# Altium PCB coilcube_frontend_v2.PcbDoc
Units mil, origin at the board's own origin, x right, y up, seen from the top; angles counter-clockwise.
Board outline 1500 x 875 mil, 2 copper layers (Top Layer, Bottom Layer); 42 components, 27 nets, 107 pads, 7 vias.
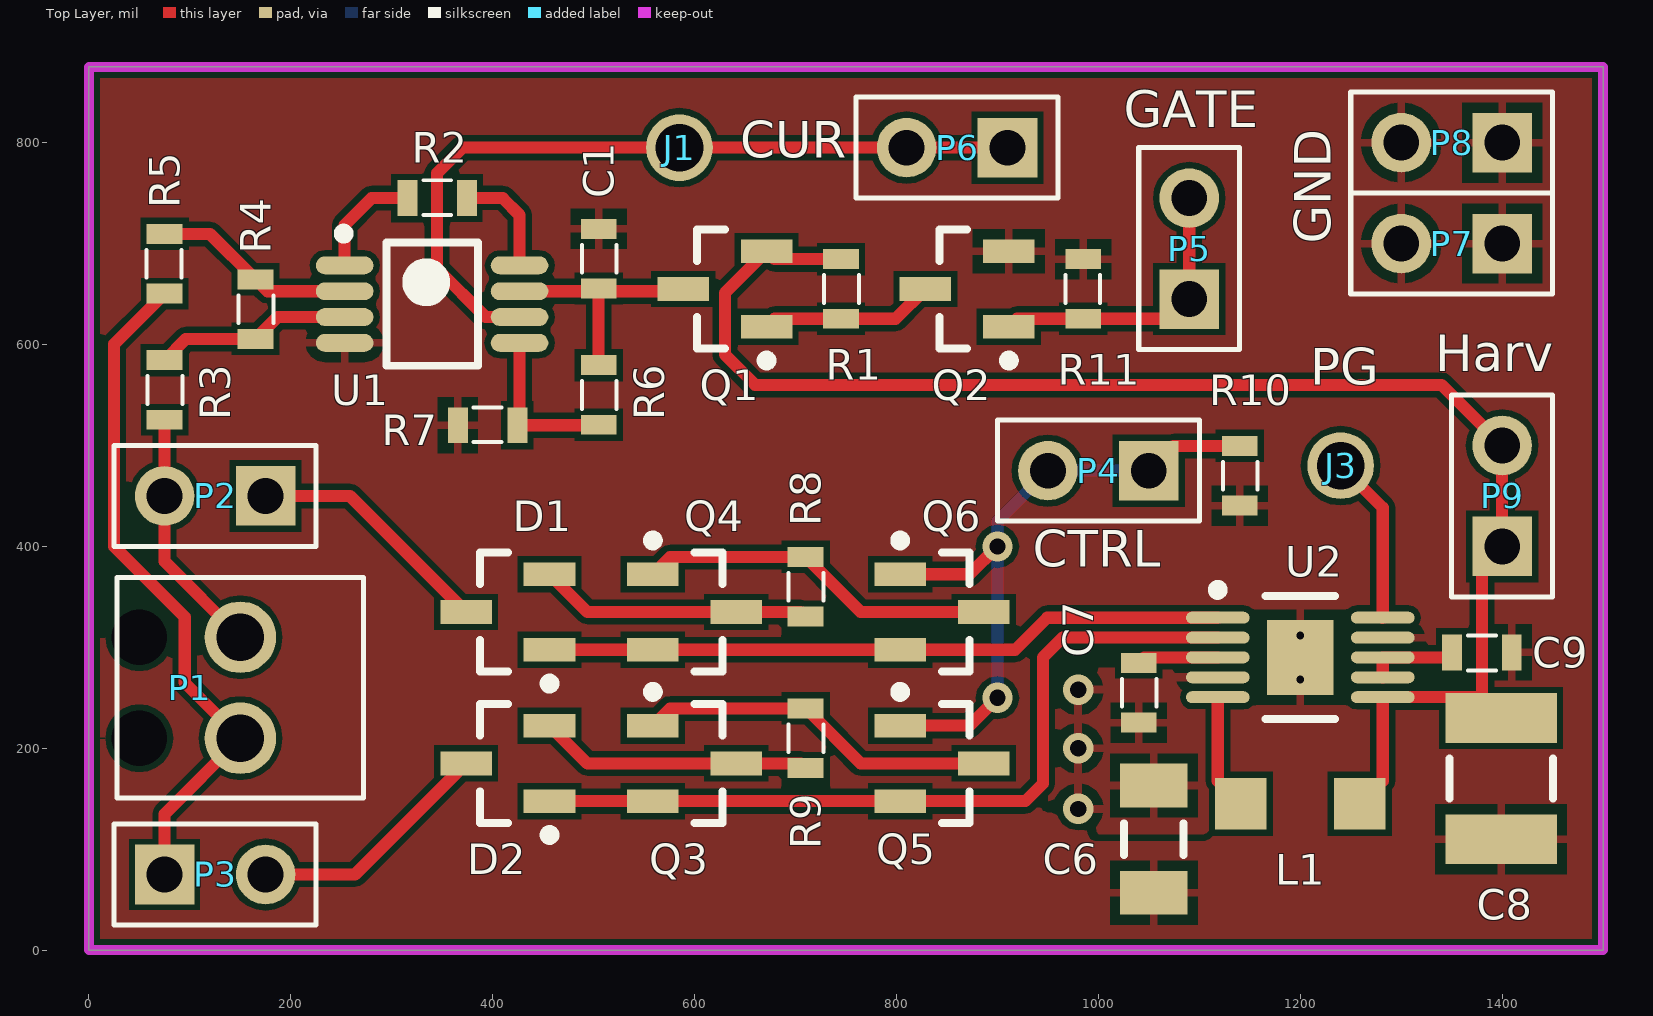
[diagram p0: Top Layer view]
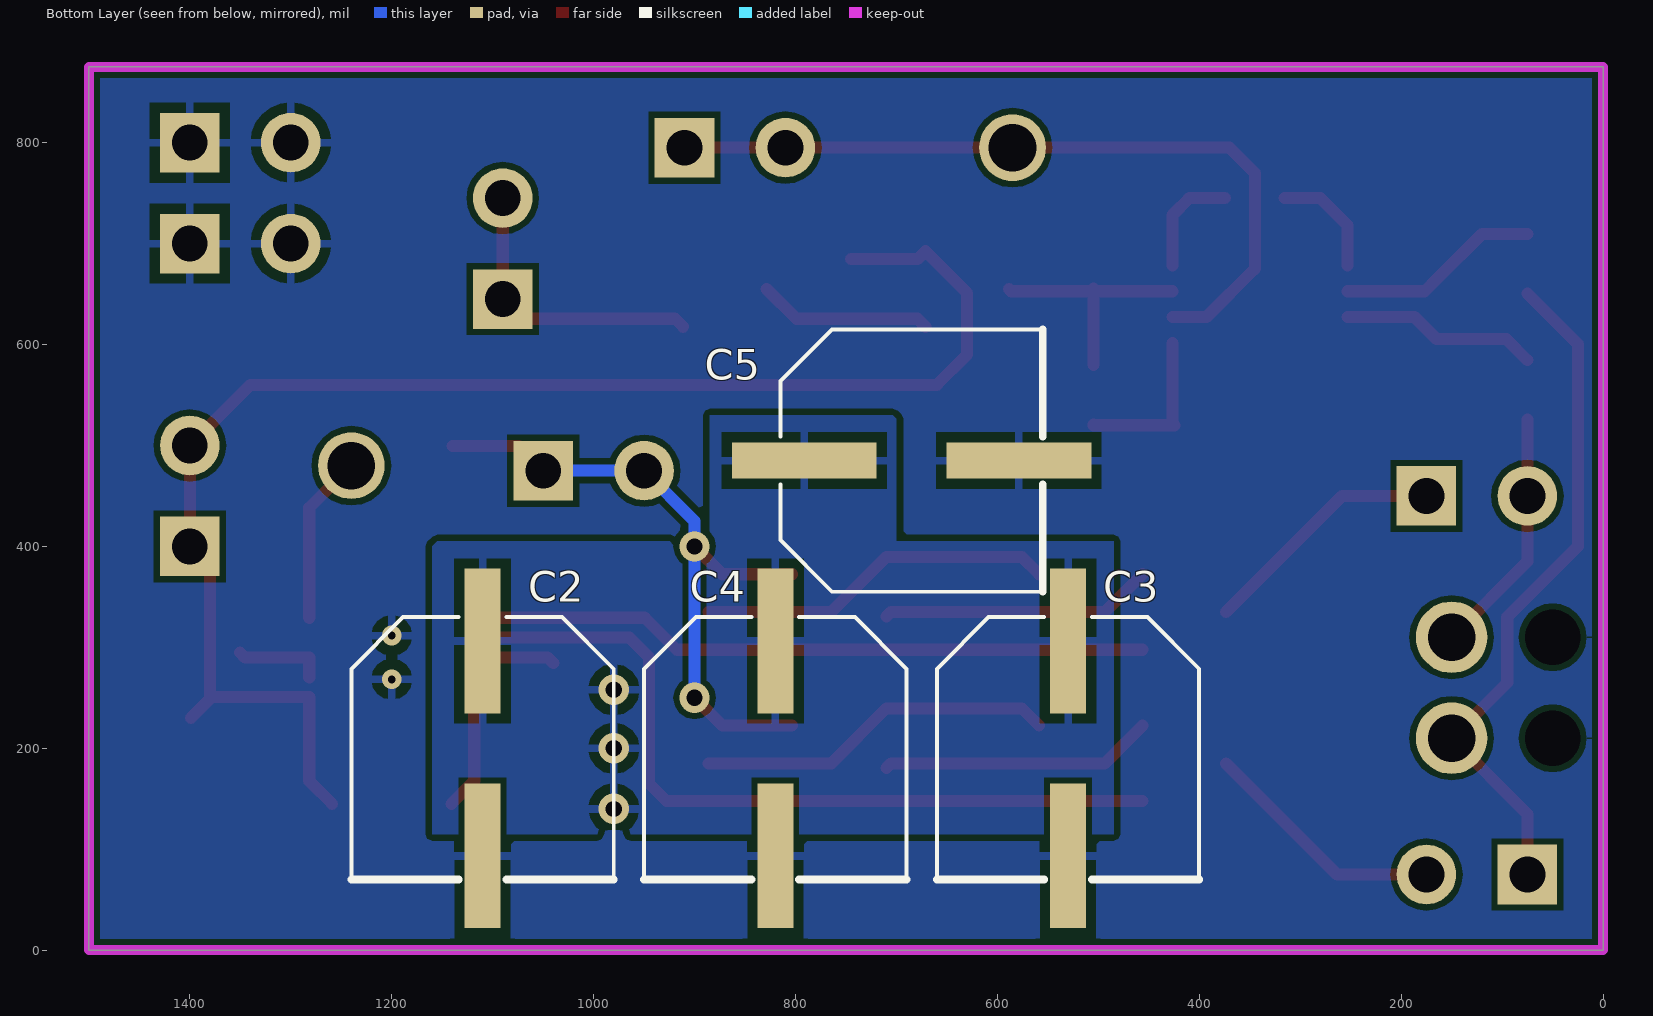
[diagram p1: Bottom Layer view, seen from below]

## Layer stack, top to bottom
Top Solder: solder mask 0.4, Solder Resist, Dk 3.5
Top Layer: signal copper 1.4
Dielectric 1: dielectric 12.6, FR-4, Dk 4.8
Bottom Layer: signal copper 1.4
Bottom Solder: solder mask 0.4, Solder Resist, Dk 3.5

## Board outline
0,0 0,875 1500,875 1500,0

## Design rules (kind name [scope] priority, off if disabled: settings)
Clearance "Clearance~Sunstone Circuits" [All] p1: gap=6 // Sunstone Circuits Minimum Clearance Rule (Double Sided)
HoleSize "HoleSize~Sunstone Circuits" [All] p1: absolutevalues=TRUE maxlimit=251 minlimit=16 maxpercent=80.000 minpercent=20.000 // SSC Hole Size Rule For Single Sided & Double Sided Designs.
HoleSize Testpoint [All] p2: absolutevalues=TRUE maxlimit=100 minlimit=1 maxpercent=80.000 minpercent=20.000
HoleSize TestPointUsage [All] p3: absolutevalues=TRUE maxlimit=100 minlimit=1 maxpercent=80.000 minpercent=20.000
MinimumAnnularRing "MinimumAnnularRing~Sunstone Circuits" [All] p1: minimumring=7 // Sunstone Circuits Minimum Annular Ring (Double Sided)
PlaneClearance "PlaneClearance~Sunstone Circuits" [All] p1: clearance=12 // Sunstone Circuits Power Plane Clearance Rule (Double Sided)
PlaneConnect "PlaneConnect~Sunstone Circuits" [All] p1: planeconnectstyle=Relief reliefexpansion=10 reliefentries=4 reliefconductorwidth=8 reliefairgap=10 // Sunstone Circuits Power Plane Connect Rule (Double Sided)
PolygonConnect "PolygonConnect~Sunstone Circuits" [All] p1: connectstyle=Relief reliefconductorwidth=8 reliefentries=4 polygonreliefangle="90 Angle" airgapwidth=10 // Sunstone Circuits Polygon Connect Style (Double Sided)
RoomDefinition coilcube_frontend_v2 [InComponentClass('coilcube_frontend_v2')] p1: confinementstyle=ConfineIn formatcopy=TRUE lockcomponents=FALSE outline 12.44,138.44 12.44,381.56 12.5,381.56 12.5,512.5 40.39,512.5 40.39,736.26 288.74,736.26 288.74,779.61 545.4,779.61 545.4,854.9 747.5,854.9 747.5,857.5 1237.5,857.5 1237.5,862.5 1462.5,862.5 1462.5,275.47 1474.94,275.47 1474.94,64.53 1297.65,64.53 1297.65,64.13 1253.86,64.13 1253.86,9.05 386.14,9.05 386.14,12.5 12.5,12.5 12.5,138.44
RoutingVias "RoutingVias~Sunstone Circuits" [All] p1: holewidth=16 width=30 viastyle="Through Hole" minholewidth=16 minwidth=30 maxholewidth=20 maxwidth=40 // Sunstone Circuits Routing Vias Rule (Double Sided)
ShortCircuit "ShortCircuit~Sunstone Circuits" [All] p1: allowed=FALSE // Sunstone Circuits Short Circuit Rule~Do Not Allow (Double Sided)
SolderMaskExpansion "SolderMaskExpansion~Sunstone Circuits" [All] p1: expansion=3 // Sunstone Circuits Solder Mask Expansion Rule (Double Sided)
ViasUnderSMD "ViasUnderSMD~Sunstone Circuits" [All] p1: allowed=FALSE // Sunstone Circuits Vias Under SMD~Do Not Allow (Double Sided)
Width "Width~Sunstone Circuits" [All] p1: maxlimit=100 minlimit=6 preferedwidth=10 // Sunstone Circuits Minimum Width Rule (Double Sided)
26 further rules are at their usual default settings.

## Components (designator, comment, footprint, x,y, rotation, side; value= is the part's Value field where it differs from the comment)
C1 "Ceramic capacitor" 0603 505,685 r90 top
C2 "Aluminum capacitor" KEMET_EDK_9H 1110,200 r90 bottom
C3 "Aluminum capacitor" KEMET_EDK_9H 530,200 r90 bottom
C4 "Aluminum capacitor" KEMET_EDK_9H 820,200 r90 bottom
C5 "Aluminum capacitor" KEMET_EDK_9H 685,485 r0 bottom
C6 "Ceramic capacitor" 1206 1055,110 r270 top
C7 "Ceramic capacitor" 0603 1040,255 r90 top
C8 "Ceramic capacitor" 1210 1395,170 r90 top
C9 "Ceramic capacitor" 0603 1380,295 r0 top
D1 "D_BAS40-04" SOT23-3 415,335 r180 top
D2 "D_BAS40-04" SOT23-3 415,185 r180 top
J1 "5004" TestPoint 585,795 r0 top
J3 "5004" TestPoint 1240,480 r0 top
L1 "Chip inductor" CDRH2D18 1200,145 r180 top
P1 "Screw connector" MPT_2position 150,260 r270 top
P2 "1 x 2 header" "1x2 header" 125,450 r180 top
P3 "1 x 2 header" "1x2 header" 125,75 r0 top
P4 "1 x 2 header" "1x2 header" 1000,475 r180 top
P5 "1 x 2 header" "1x2 header" 1090,695 r90 top
P6 "1 x 2 header" "1x2 header" 860,795 r180 top
P7 "1 x 2 header" "1x2 header" 1350,700 r180 top
P8 "1 x 2 header" "1x2 header" 1350,800 r180 top
P9 "1 x 2 header" "1x2 header" 1400,450 r90 top
Q1 "Si2333DDS" SOT23-3 630,655 r180 top
Q2 "Si2312CDS" SOT23-3 870,655 r180 top
Q3 "Si2342DS" SOT23-3 600,185 r0 top
Q4 "Si2342DS" SOT23-3 600,335 r0 top
Q5 "Si2312CDS" SOT23-3 845,185 r0 top
Q6 "Si2312CDS" SOT23-3 845,335 r0 top
R1 "Chip resistor" 0603 745,655 r90 top
R2 "Chip resistor" 0603 345,745 r180 top
R3 "Chip resistor" 0603 75,555 r90 top
R4 "Chip resistor" 0603 165,635 r90 top
R5 "Chip resistor" 0603 75,680 r270 top
R6 "Chip resistor" 0603 505,550 r90 top
R7 "Chip resistor" 0603 395,520 r180 top
R8 "Chip resistor" 0603 710,360 r90 top
R9 "Chip resistor" 0603 710,210 r90 top
R10 "Chip resistor" 0603 1140,470 r90 top
R11 "Chip resistor" 0603 985,655 r270 top
U1 "INA333" MSOP-8 340,640 r0 top
U2 "LTC3588-1" TSSOP50P490X110_HS-11N 1200,290 r0 top

## Footprints (in the part's own frame and the unit in brackets; to place one, negate y for a bottom-side part, rotate by r counter-clockwise, add the part's x,y. Pads: shape width x height; smd on the part's side, far side on the other; paste and mask are expansions set on the pad)
"1x2 header" [mm] "1x2 header, 100 mils"
  rect 1.5x1.5 hole 0.9: 1(-1.27,0)
  round 1.5 hole 0.9: 2(1.27,0)
  silkscreen extent -2.54,-1.27 2.54,1.27, body extent -2.53,-1.26 2.53,1.26, height 8.38
0603 [mm] "2-Leads, Body 1.55x0.85mm, IPC Medium Density"
  rect 0.5x0.9 smd: 1(-0.75,0) 2(0.75,0)
  silkscreen extent -0.35,-0.45 0.35,0.43, body extent -0.75,-0.42 0.75,0.43, height 0.5
1206 [mm]
  rect 1.1x1.7 smd: 1(-1.35,0) 2(1.35,0)
  silkscreen extent -0.4,-0.75 0.4,0.75, body extent -1.7,-0.9 1.7,0.9, height 1.3
1210 [mm]
  rect 1.25x2.8 smd: 1(1.525,-0.102) 2(-1.525,-0.102)
  silkscreen extent -0.5,-1.4 0.5,1.2, body extent -1.8,-1.5 1.8,1.3, height 2.8
CDRH2D18 [mm] "Sumdia SMD power inductor"
  rect 1.3x1.3 smd: 1(-1.5,0) 2(1.5,0)
  body extent -1.5,-1.7 1.5,1.8, height 2
KEMET_EDK_9H [mm] "Kemet surface mount aluminum capacitor EDK series 9H"
  rect 3.64x0.91 smd: 1(2.7,0) 2(-2.7,0)
  silkscreen extent -3.3,-3.3 3.3,3.3, body extent -3.3,-3.3 3.3,3.3, height 8.7
MPT_2position [mm] "Screw connector 2 pos"
  round 1.8 hole 1.2: 1(-1.27,0) 2(1.27,0)
  round 0 hole 1.4: ""(-1.27,-2.54) ""(1.27,-2.54)
  silkscreen extent -2.77,-3.1 2.77,3.1
MSOP-8 [mm] "TSOP, 8-Leads, Body 3.00x3.00mm, Pitch 0.65mm, IPC Medium Density"
  oval 1.45x0.45 smd: 1(-2.2,0.975) 2(-2.2,0.325) 3(-2.2,-0.325) 4(-2.2,-0.975) 5(2.2,-0.975) 6(2.2,-0.325) 7(2.2,0.325) 8(2.2,0.975)
  silkscreen extent -2.35,-1.55 1.15,1.9, body extent -1.55,-1.55 1.55,1.55, height 1.1
SOT23-3 [mm] "SOT23, 3-Leads, Body 2.9x1.3mm, Pitch 0.95mm, Lead Span 2.3mm, IPC Medium Density"
  rect 1.3x0.6 smd: 1(-1.05,0.95) 2(-1.05,-0.95) 3(1.05,0)
  silkscreen extent -1.18,-1.5 0.7,1.92, body extent -0.7,-1.5 0.7,1.5, height 1.2
TestPoint [mm]
  round 1.68 hole 1.2: 1(0,0)
  body extent -1.26,-1.27 1.27,1.27, height 4.57
TSSOP50P490X110_HS-11N [mm] "TSSOP, 10-Leads, Body 3.00x3.00mm, Pitch 0.50mm, Thermal Pad 1.88.2x1.68.2mm, IPC Medium Density"
  oval 1.6x0.3 smd: 1(-2.075,1) 2(-2.075,0.5) 3(-2.075,0) 4(-2.075,-0.5) 5(-2.075,-1) 6(2.075,-1) 7(2.075,-0.5) 8(2.075,0) 9(2.075,0.5) 10(2.075,1)
  rect 1.68x1.88 smd: 11(0,0)
  silkscreen extent -2.2,-1.55 0.87,1.82, body extent -1.55,-1.55 1.55,1.55, height 1.1

## Part data
C1: library part C_0.1u_25V_0603_ceramic, "Ceramic capacitor, 0.1 uF, 0603 package"
C2 C3 C4 C5: library part C_100u_35V_aluminum, "Aluminum capacitor, 100 uF, 35 V, KEMET EDK 9H"
C6: library part C_22u_35V_1206_ceramic, "Ceramic capacitor, 22 uF, 35 V, 1206 package"
C7: library part C_1u_16V_0603_ceramic, "Ceramic capacitor, 1 uF, 16 V, 0603 package"
C8: library part C_100u_10V_1210_ceramic, "Ceramic capacitor, 100u, 1210 package"
C9: library part C_4.7u_10V_0603_ceramic, "Ceramic capacitor, 4.7u, 10V, 0603 package"
D1 D2: "SURFACE MOUNT SCHOTTKY BARRIER DIODE"
J1 J3: library part TestPoint, "TEST POINT PC MINI .040\"D YELLOW"
L1: library part L_10uH_1A_180m, "Chip inductor, 10 uH,  1A, 180 mOhm"
P1: library part MPT_2POS, "Screw connector 2 positions"
P2 P3 P4 P5 P6 P7 P8 P9: "100 mils standard header"
Q1: "P-Channel 12 V (D-S) MOSFET"
Q2 Q5 Q6: "N-Channel 20 V (D-S) MOSFET"
Q3 Q4: "N-Channel 8 V (D-S) MOSFET"
R1 R3 R4 R5 R8 R9 R10 R11: library part R_1M_0603, "Chip resistor, 1 Meg, 0603 package"
R2: library part R_100K_0603, "Chip resistor, 100K, 0603 package"
R6: library part R_150K_0603, "Chip resistor, 150K, 0603 package"
R7: library part R_300K_0603, "Chip resistor, 300K, 0603 package"
U1: "Micro-Power (50µA), Zerø-Drift, Rail-to-Rail Out  Instrumentation Amplifier"
U2: "Piezoelectric Energy   Harvesting Power Supply"

## Via types
v1: diameter 30, hole 16, Top Layer to Bottom Layer, 5 vias
v2: diameter 19.68, hole 7.87, Top Layer to Bottom Layer, 2 vias

## Nets (pads, with @x,y where several pads share a name; then routed paths per layer and width w, separated by ;. In a path a pad name is that pad's centre, name@x,y a point inside that pad or via, vN(x,y) a via of type N, cw(c..) or ccw(c..) an arc to the next point about the centre after c; other vN are vias at no path point)
CONTROL: P4.1 P4.2 Q5.1 Q6.1 R10.2 | length 661.4
  Top Layer w12: Q5.1 872.4,222.4 v1(900,250) ; Q6.1 872.4,372.4 v1(900,400) ; P4.1 1074.53,499.53 R10.2
  Bottom Layer w12: v1(900,250) v1(900,400) 900,425 P4.2 P4.1
CURRENT_WAVEFORM: J1.1 P6.1 P6.2 U1.6 | length 771.8
  Top Layer w12: U1.6 392.8,627.2 345,675 345,770 370,795 605,795 P6.2 P6.1
GND: C1.2 C2.2 C3.2 C4.2 C5.2 C6.2 C8.2 C9.2 P7.1 P7.2 P8.1 P8.2 Q2.2 R7.2 R10.1 R11.1 U1.4 U2.9 U2.11
  other v2: 1200,268.35 1200,311.65
HARVEST_GATED: C1.1 Q1.3 R6.2 U1.7 | length 238.9
  Top Layer w12: U1.7 C1.1@505,652.8 ; R6.2 C1.1@505,652.8 ; C1.1 C1.1@505,652.8 ; Q1.3 586.46,652.8 C1.1@505,652.8
NetC7_2: C7.2 U2.3 | length 80.6
  Top Layer w12: C7.2 1045.47,290 U2.3
NetC9_1: C9.1 U2.7 U2.8 | length 90.5
  Top Layer w12: U2.7 U2.8 1345.47,290 C9.1
NetD1_1: D1.1 Q4.2 Q6.2 U2.1 | length 675.1
  Top Layer w12: D1.1 Q6.2 917.6,297.6 949.37,329.37 U2.1
NetD1_2: D1.2 Q4.3 R8.1 | length 271
  Top Layer w12: D1.2 493.74,335 Q4.3 705.47,335 R8.1
NetD1_3: D1.3 P2.1 | length 246.3
  Top Layer w12: P2.1 258.66,450 D1.3
NetD2_1: D2.1 Q3.2 Q5.2 U2.2 | length 802.3
  Top Layer w12: D2.1 Q3.2 Q5.2 927.6,147.6 945,165 945,290 964.69,309.69 U2.2
NetD2_2: D2.2 Q3.3 R9.1 | length 271
  Top Layer w12: D2.2 493.74,185 Q3.3 705.47,185 R9.1
NetD2_3: D2.3 P3.2 | length 244.2
  Top Layer w12: P3.2 263.66,75 D2.3
NetL1_2: L1.2 U2.5 | length 115
  Top Layer w12: U2.5 1118.31,167.64 L1.2
NetP1_1: P1.1 P2.2 R3.1 | length 246.5
  Top Layer w12: R3.1 P2.2 75,385 P1.1
NetP1_2: P1.2 P3.1 R5.2 | length 679
  Top Layer w12: P3.1 75,135 P1.2 95,265 95,330 25,400 25,600.47 R5.2
NetQ1_1: Q1.1 Q2.3 R1.1 | length 172.8
  Top Layer w12: Q1.1 679.21,625.47 R1.1 799.13,625.47 Q2.3
NetQ3_1: Q3.1 Q5.3 R9.2 | length 357.4
  Top Layer w12: Q3.1 575.79,239.53 R9.2 764.53,185 Q5.3
NetQ4_1: Q4.1 Q6.3 R8.2 | length 357.4
  Top Layer w12: Q4.1 575.79,389.53 R8.2 764.53,335 Q6.3
NetR2_1: R2.1 U1.8 | length 109
  Top Layer w12: R2.1 410,745 426.61,728.39 U1.8
NetR2_2: R2.2 U1.1 | length 113.1
  Top Layer w12: U1.1 253.39,718.39 280,745 R2.2
NetR3_2: R3.2 R4.1 U1.3 | length 196.1
  Top Layer w12: R3.2 95.94,605.47 R4.1 186.73,627.2 U1.3
NetR4_2: R4.2 R5.1 U1.2 | length 201.9
  Top Layer w12: R5.1 120,709.53 R4.2 176.73,652.8 U1.2
NetR6_1: R6.1 R7.1 U1.5 | length 163.1
  Top Layer w12: U1.5 426.61,522.09 R7.1 504.53,520 R6.1
PGOOD: J3.1 U2.10 | length 167.9
  Top Layer w12: J3.1 1281.69,438.31 U2.10
SW: P5.1 P5.2 Q2.1 R11.2 | length 290
  Top Layer w12: Q2.1 919.21,625.47 R11.2 1070.47,625.47 P5.1 P5.2
V_HARVEST: C8.1 L1.1 P9.1 P9.2 Q1.2 R1.2 U2.6 | length 1503.8
  Top Layer w12: R1.2 679.21,684.53 Q1.2 630,651.06 630,590 660,560 1340,560 P9.2 P9.1 1380,380 C8.1@1380,249.04 ; L1.1 1281.69,167.64 U2.6 1378.41,250.63 C8.1@1380,249.04 ; C8.1 C8.1@1380,249.04
VCAP: C2.1 C3.1 C4.1 C5.1 C6.1 C7.1 U2.4
  other v1: 980,140 980,200 980,258
pads on no net: P1.

## Polygon pours and split planes (outlines as drawn)
GND on Top Layer (solid, pour order 6): 0,0 1500,0 1500,875 0,875
VCAP on Top Layer (solid, pour order 2): 1155,115 950,115 950,280 1155,280
GND on Bottom Layer "Top Layer-No Net" (solid, pour order 6): 1.34,0.21 1501.34,0.21 1501.34,875.21 1.34,875.21
VCAP on Bottom Layer "Top Layer-VCAP" (solid, pour order 4): 485,405 485,115 1160,115 1160,400 1155,405 885,405 885,530 700,530 700,405

## Keep-outs
Keep-Out Layer:
  the board outline again, w10

## Silkscreen, mask and mechanical layers (free items; w line width, h text height)
Top Overlay:
  text "GATE" at 1025,815 h36
  text "CUR" at 645,785 h36
  text "GND" at 1230,700 h36 r90
  text "Harv" at 1333.65,573.65 h36
  text "PG" at 1210,560 h36
  text "CTRL" at 935,380 h36